# Altium PCB PCB.PcbDoc
Units mm, origin at the board's own origin, x right, y up, seen from the top; angles counter-clockwise.
Board outline 30 x 30 mm, 2 copper layers (Top Layer, Bottom Layer); 11 components, 8 nets, 55 pads, 14 vias.
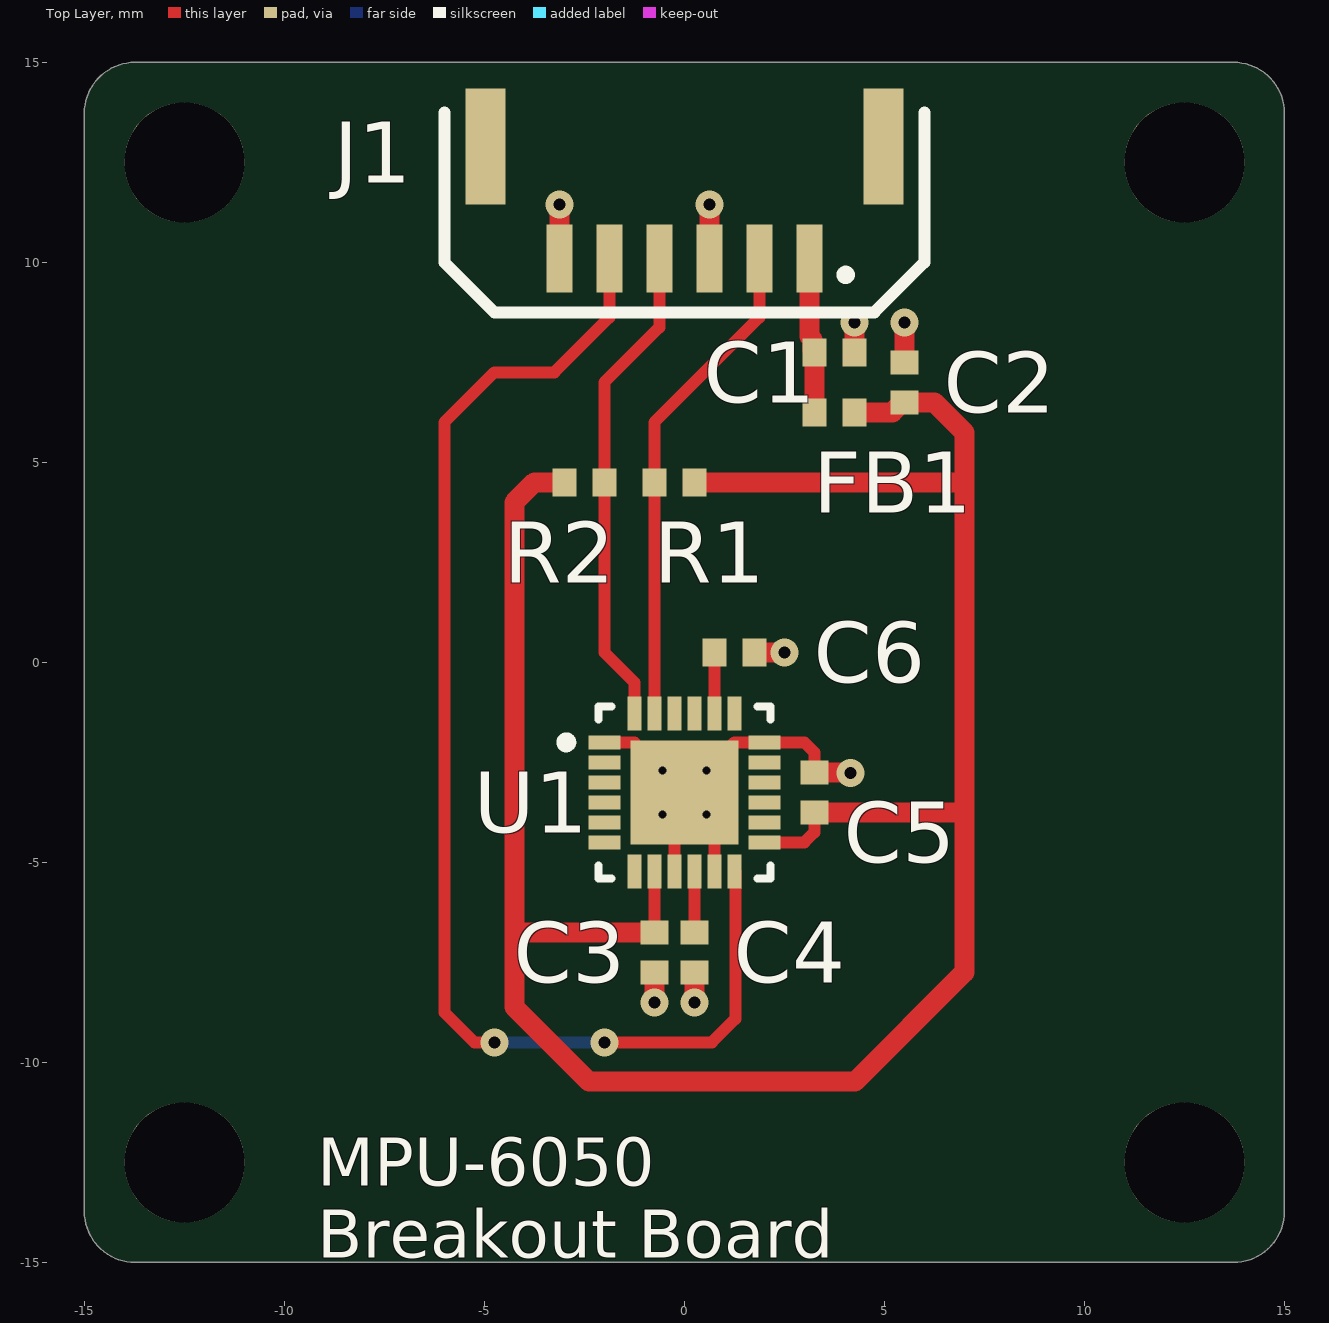
[diagram p0: Top Layer view]
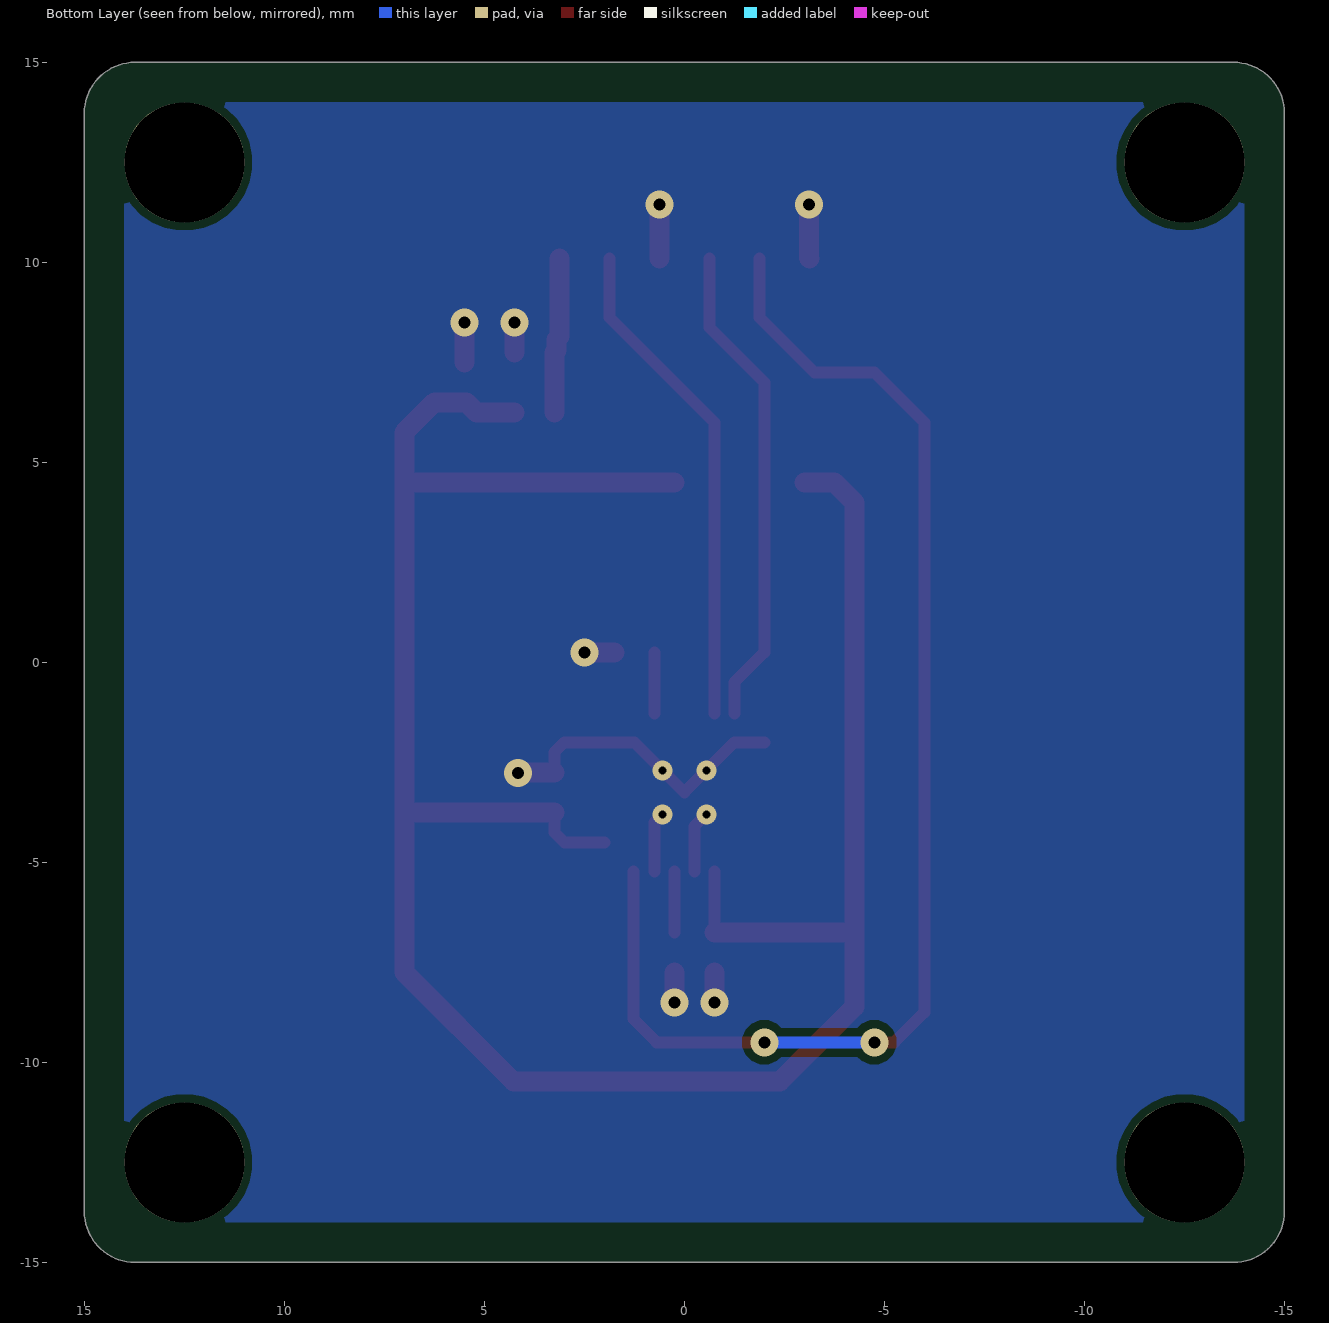
[diagram p1: Bottom Layer view, seen from below]
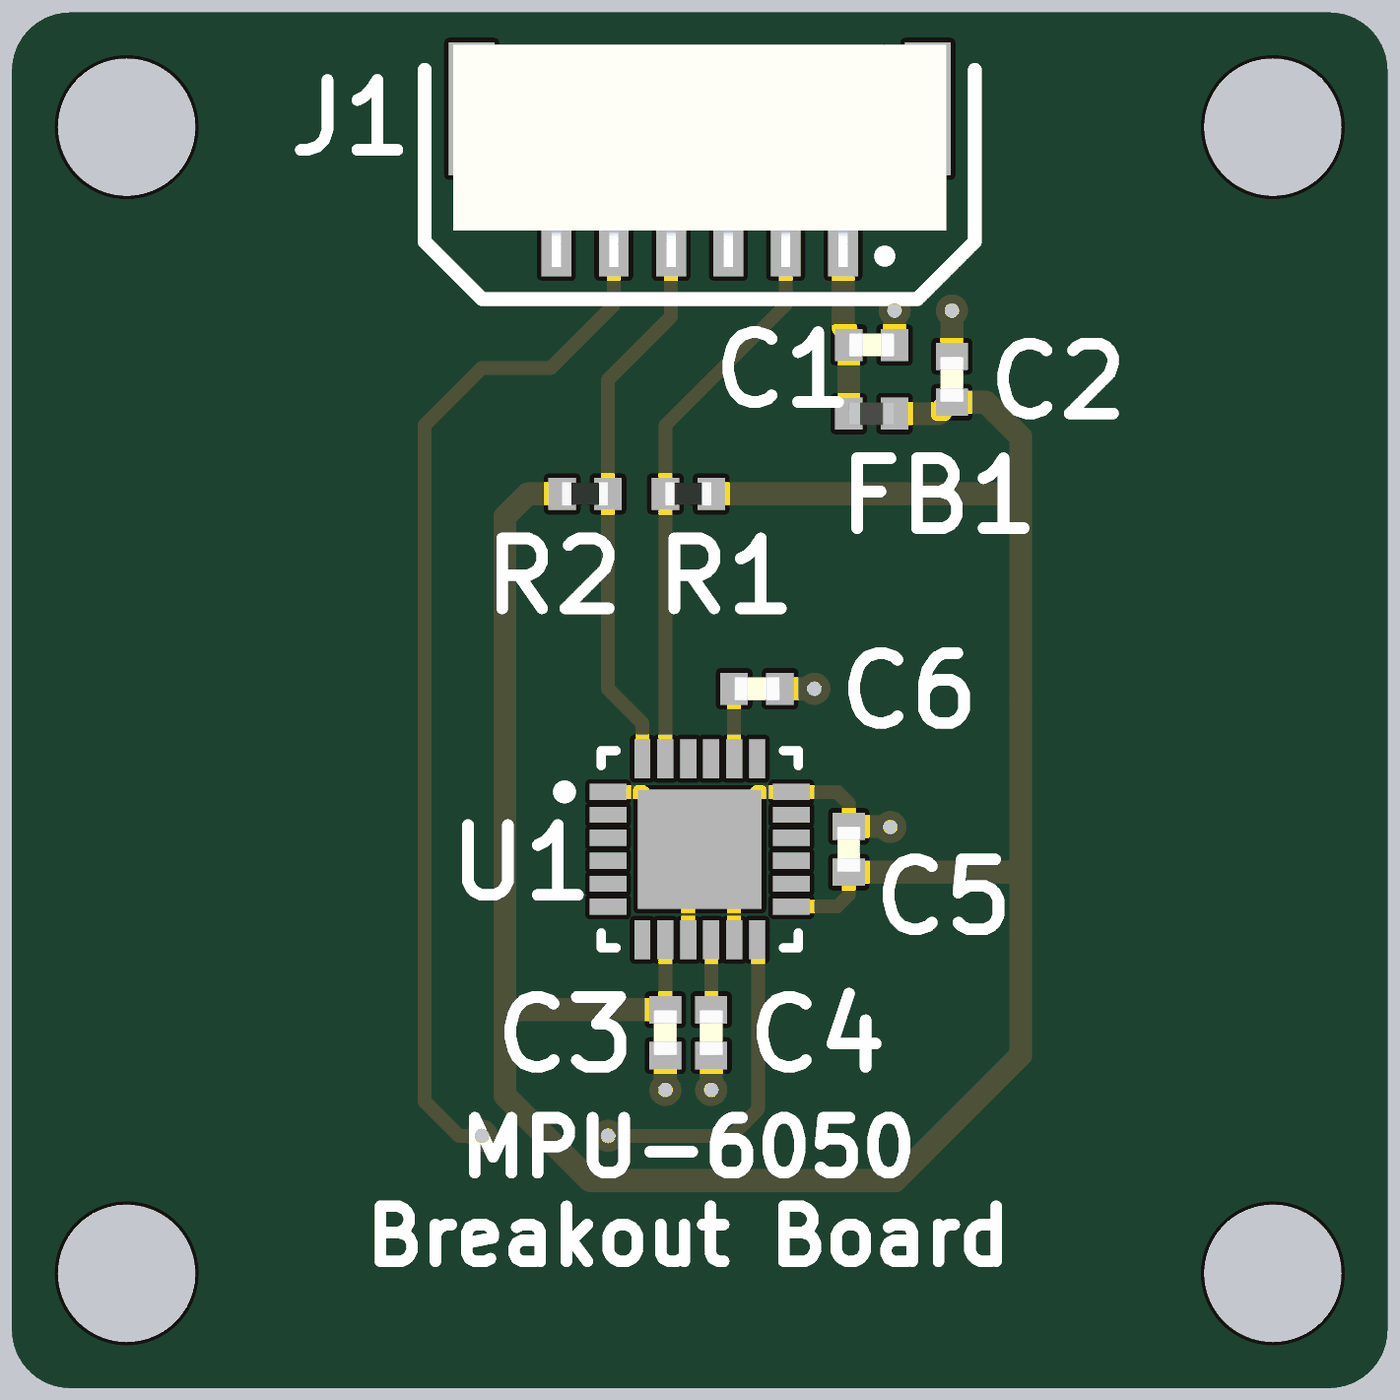
[diagram p2: 3D render of the assembled board from above, using the file's embedded part models]

## Layer stack, top to bottom
Top Solder: solder mask 0.0102, Solder Resist, Dk 3.5
Top Layer: signal copper 0.0356
Dielectric 1: dielectric 0.32, FR-4, Dk 4.8
Bottom Layer: signal copper 0.0356
Bottom Solder: solder mask 0.0102, Solder Resist, Dk 3.5

## Board outline
-15,-13.73 ccw(c-13.73,-13.73) -13.73,-15 13.73,-15 ccw(c13.73,-13.73) 15,-13.73 15,13.73 ccw(c13.73,13.73) 13.73,15 -13.73,15 ccw(c-13.73,13.73) -15,13.73

## Design rules (kind name [scope] priority, off if disabled: settings)
Clearance [All] p1: gap=0.2 ignorepadtopadclearanceinfootprint=FALSE
PolygonConnect [All] p1: connectstyle=Direct reliefconductorwidth=0.254 reliefentries=4 polygonreliefangle="90 Angle" airgapwidth=0.254
RoutingVias [All] p1: holewidth=0.3 width=0.7 viastyle="Through Hole" minholewidth=0.2 minwidth=0.4 maxholewidth=0.4 maxwidth=0.8
SolderMaskExpansion [All] p1: expansion=0.102 istentingtop=FALSE
Width [All] p1: maxlimit=0.5 minlimit=0.1 preferedwidth=0.3 toplayer_minwidth=0.2 minimp=50.000000 maximp=50.000000 favimp=50.000000
30 further rules are at their usual default settings.

## Components (designator, comment, footprint, x,y, rotation, side; value= is the part's Value field where it differs from the comment)
C1 "100n" CAP_0402 3.75,7.75 r0 top
C2 "100n" CAP_0402 5.5,7 r90 top
C3 "100n" CAP_0402 -0.75,-7.25 r270 top
C4 "100n" CAP_0402 0.25,-7.25 r270 top
C5 "10n" CAP_0402 3.25,-3.25 r90 top
C6 "2n2" CAP_0402 1.25,0.25 r0 top
FB1 "FB0402" FB_0402 3.75,6.25 r0 top
J1 "SM06B-GHS-TB" SM06B-GHS-TB 0,11.5 r180 top
R1 "2k2" RES_0402 -0.25,4.5 r0 top
R2 "2k2" RES_0402 -2.5,4.5 r180 top
U1 "MPU-6050" IS-QFN-24_V 0,-3.25 r0 top

## Footprints (in the part's own frame and the unit in brackets; to place one, negate y for a bottom-side part, rotate by r counter-clockwise, add the part's x,y. Pads: shape width x height; smd on the part's side, far side on the other; paste and mask are expansions set on the pad)
CAP_0402 [mm]
  rect 0.6x0.7 smd: 1(-0.5,0) 2(0.5,0)
  body extent -0.5,-0.26 0.5,0.26, height 0.37
FB_0402 [mm]
  rect 0.6x0.7 smd: 1(-0.5,0) 2(0.5,0)
  body extent -0.5,-0.25 0.5,0.25, height 0.51
IS-QFN-24_V [mm] "QFN, 24-Leads, Body 4x4mm, Pitch 0.5mm, Thermal Pad 2.7x2.6mm"
  rect 0.8x0.35 smd: 1(-2,1.25) 2(-2,0.75) 3(-2,0.25) 4(-2,-0.25) 5(-2,-0.75) 6(-2,-1.25) 13(2,-1.25) 14(2,-0.75) 15(2,-0.25) 16(2,0.25) 17(2,0.75) 18(2,1.25)
  rect 0.35x0.85 smd mask+0.102: 7(-1.25,-1.975) 8(-0.75,-1.975) 9(-0.25,-1.975) 10(0.25,-1.975) 11(0.75,-1.975) 12(1.25,-1.975) 19(1.25,1.975) 20(0.75,1.975) 21(0.25,1.975) 22(-0.25,1.975) 23(-0.75,1.975) 24(-1.25,1.975)
  rect 2.7x2.6 smd: 25(0,0)
  silkscreen extent -3.07,-2.15 2.15,2.15, body extent -2,-2 2,2, height 0.95
RES_0402 [mm]
  rect 0.6x0.7 smd: 1(-0.5,0) 2(0.5,0)
  body extent -0.5,-0.25 0.5,0.25, height 0.3
SM06B-GHS-TB [mm]
  rect 0.65x1.7 smd: 1(-3.125,1.4) 2(-1.875,1.4) 3(-0.625,1.4) 4(0.625,1.4) 5(1.875,1.4) 6(3.125,1.4)
  rect 1x2.9 smd: ""(-4.975,-1.4) ""(4.975,-1.4)
  silkscreen extent -6,-2.25 6,2.75, body extent -5.38,-2.8 5.38,2.05, height 4.26

## Part data
C1 C2 C3 C4 C5 C6: library part CAP_0402_10V, "Capacitor SMD 0402 10V"
FB1: library part FB_0402, "Ferrite Bead SMD 0402"
J1: "Header Connector 6 Position 1.25MM Pitch SMD Horizontal JST GH", Manufacturer=JST, Manufacturer Part Number=SM06B-GHS-TB
R1 R2: library part RES_0402, "Resistor SMD 0402"
U1: library part CMP-1753-00002-2, "3-Axis Gyroscope, Accelerometer and a Digital Motion Processor(TM) (DMP), 2.375 to 3.46 V, -40 to 85 degC, 24-Pin QFN, RoHS, Tape and Reel", Manufacturer=InvenSense, Standard Package=5,000, Category=Sensors,Transducers, Datasheet URL=http://datasheet.octopart.com/MPU-6050-InvenSense-datasheet-14421344.pdf, Datasheet Version="Rev. 3.3, 05/2012", Dynamic Catalog=MPU-6000™Series, Family=Multifunction, Featured Product=MPU-60506-Axis,IntegratedI²CSolution, Manufacturer URL=http://www.invensense.com/, Online Catalog=MPU-6000™Series, Other Names="1428-1007-2 / MPU6050", Output Type=Digital, Sensor Type=MotionTracking, Unit PriceUSD=Digital

## Free pads (board coordinates)
  round 3 hole 3 unplated mask+0.07: MH(-12.5,-12.5) MH(-12.5,12.5) MH(12.5,-12.5) MH(12.5,12.5)

## Via types
v1: diameter 0.7, hole 0.3, Top Layer to Bottom Layer, tented both sides, 10 vias
v2: diameter 0.5, hole 0.2, Top Layer to Bottom Layer, 4 vias

## Nets (pads, with @x,y where several pads share a name; then routed paths per layer and width w, separated by ;. In a path a pad name is that pad's centre, name@x,y a point inside that pad or via, vN(x,y) a via of type N, cw(c..) or ccw(c..) an arc to the next point about the centre after c; other vN are vias at no path point)
+3V3: C2.1 C3.1 C5.1 FB1.2 R1.2 R2.2 U1.8 U1.13 | length 61.2
  Top Layer w0.3: C3.1 U1.8 ; U1.13 3,-4.5 3.25,-4.25 C5.1
  Top Layer w0.5: R2.2 -3.75,4.5 -4.25,4 -4.25,-6.75 ; C3.1 -4.25,-6.75 ; R1.2 7,4.5 ; C5.1 7,-3.75 ; FB1.2 5.2,6.25 C2.1@5.45,6.5 ; C2.1 6.25,6.5 7,5.75 7,4.5 ; -4.25,-6.75 -4.25,-8.616 -2.387,-10.478 4.272,-10.478 7,-7.75 7,-3.75 ; 7,-3.75 7,4.5
+3V3_CONN: C1.1 FB1.1 J1.1 | length 3.9
  Top Layer w0.5: J1.1 3.125,8.143 3.2,8.068 3.2,7.8 C1.1 FB1.1
GND: C1.2 C2.2 C3.2 C4.2 C5.2 C6.2 J1.3 J1.6 U1.1 U1.9 U1.11 U1.18 U1.25 | length 17.6
  Top Layer w0.3: U1.1 -1.25,-2 v2(-0.55,-2.7) U1.25 v2(0.55,-2.7) 1.25,-2 U1.18 3,-2 3.25,-2.25 C5.2 ; v2(-0.55,-3.8) -0.25,-4.1 U1.9 ; v2(0.55,-3.8) 0.75,-4 U1.11
  Top Layer w0.5: J1.6 -3.12,10.105 -3.12,11.438 v1(-3.115,11.442) ; v1(-0.75,-8.5) C3.2 ; v1(0.25,-8.5) C4.2 ; J1.3 v1(0.625,11.447) ; C6.2 v1(2.5,0.25) ; C5.2 3.258,-2.758 4.151,-2.758 v1(4.158,-2.765) ; C1.2 v1(4.25,8.5) ; C2.2 v1(5.5,8.5)
I2C_SCL: J1.2 R1.1 U1.23 | length 12.5
  Top Layer w0.3: U1.23 R1.1 -0.75,6 1.875,8.625 J1.2
I2C_SDA: J1.4 R2.1 U1.24 | length 12.3
  Top Layer w0.3: U1.24 -1.25,-0.5 -2,0.25 R2.1 -2,7 -0.625,8.375 J1.4
IMU_CPOUT: C6.1 U1.20 | length 1.5
  Top Layer w0.3: U1.20 C6.1
IMU_INT: J1.5 U1.12 | length 32.7
  Top Layer w0.3: v1(-4.75,-9.5) -5.25,-9.5 -6,-8.75 -6,6 -4.75,7.25 -3.25,7.25 -1.875,8.625 J1.5 ; v1(-2,-9.5) 0.69,-9.5 1.275,-8.915 U1.12@1.275,-5.225
  Bottom Layer w0.3: v1(-4.75,-9.5) v1@-2.25,-9.5
IMU_REG: C4.1 U1.10 | length 1.5
  Top Layer w0.3: C4.1 U1.10
pads on no net: J1. U1.2 U1.3 U1.4 U1.5 U1.6 U1.7 U1.14 U1.15 U1.16 U1.17 U1.19 U1.21 U1.22

## Polygon pours and split planes (outlines as drawn)
GND on Bottom Layer "GND_L02_P000" (solid, pour order 0): -14,14 14,14 14,-14 -14,-14

## Silkscreen, mask and mechanical layers (free items; w line width, h text height)
Top Overlay:
  text "MPU-6050 / Breakout Board" at -9.174,-14.889 h1.2
Mechanical 1:
  lines w0.2: -15,-13.73 ccw(c-13.73,-13.73) -13.73,-15 -11,-15 13.73,-15 ccw(c13.73,-13.73) 15,-13.73 15,13.73 ccw(c13.73,13.73) 13.73,15 -13.73,15 ccw(c-13.73,13.73) -15,13.73 -15,-13.73